# Altium PCB Choin1_0.PcbDoc (part 3 of 3)
Units mm, origin at the board's own origin, x right, y up, seen from the top; angles counter-clockwise.
Board outline 61 x 61 mm, 6 copper layers (Top Layer, MidLayer1, MidLayer 2, Mid-Layer 3, Mid-Layer 4, Bottom Layer), stack 1.533 mm thick; 195 components, 482 nets, 1610 pads, 432 vias.
Unrouted connection lines stored in the file: 170.
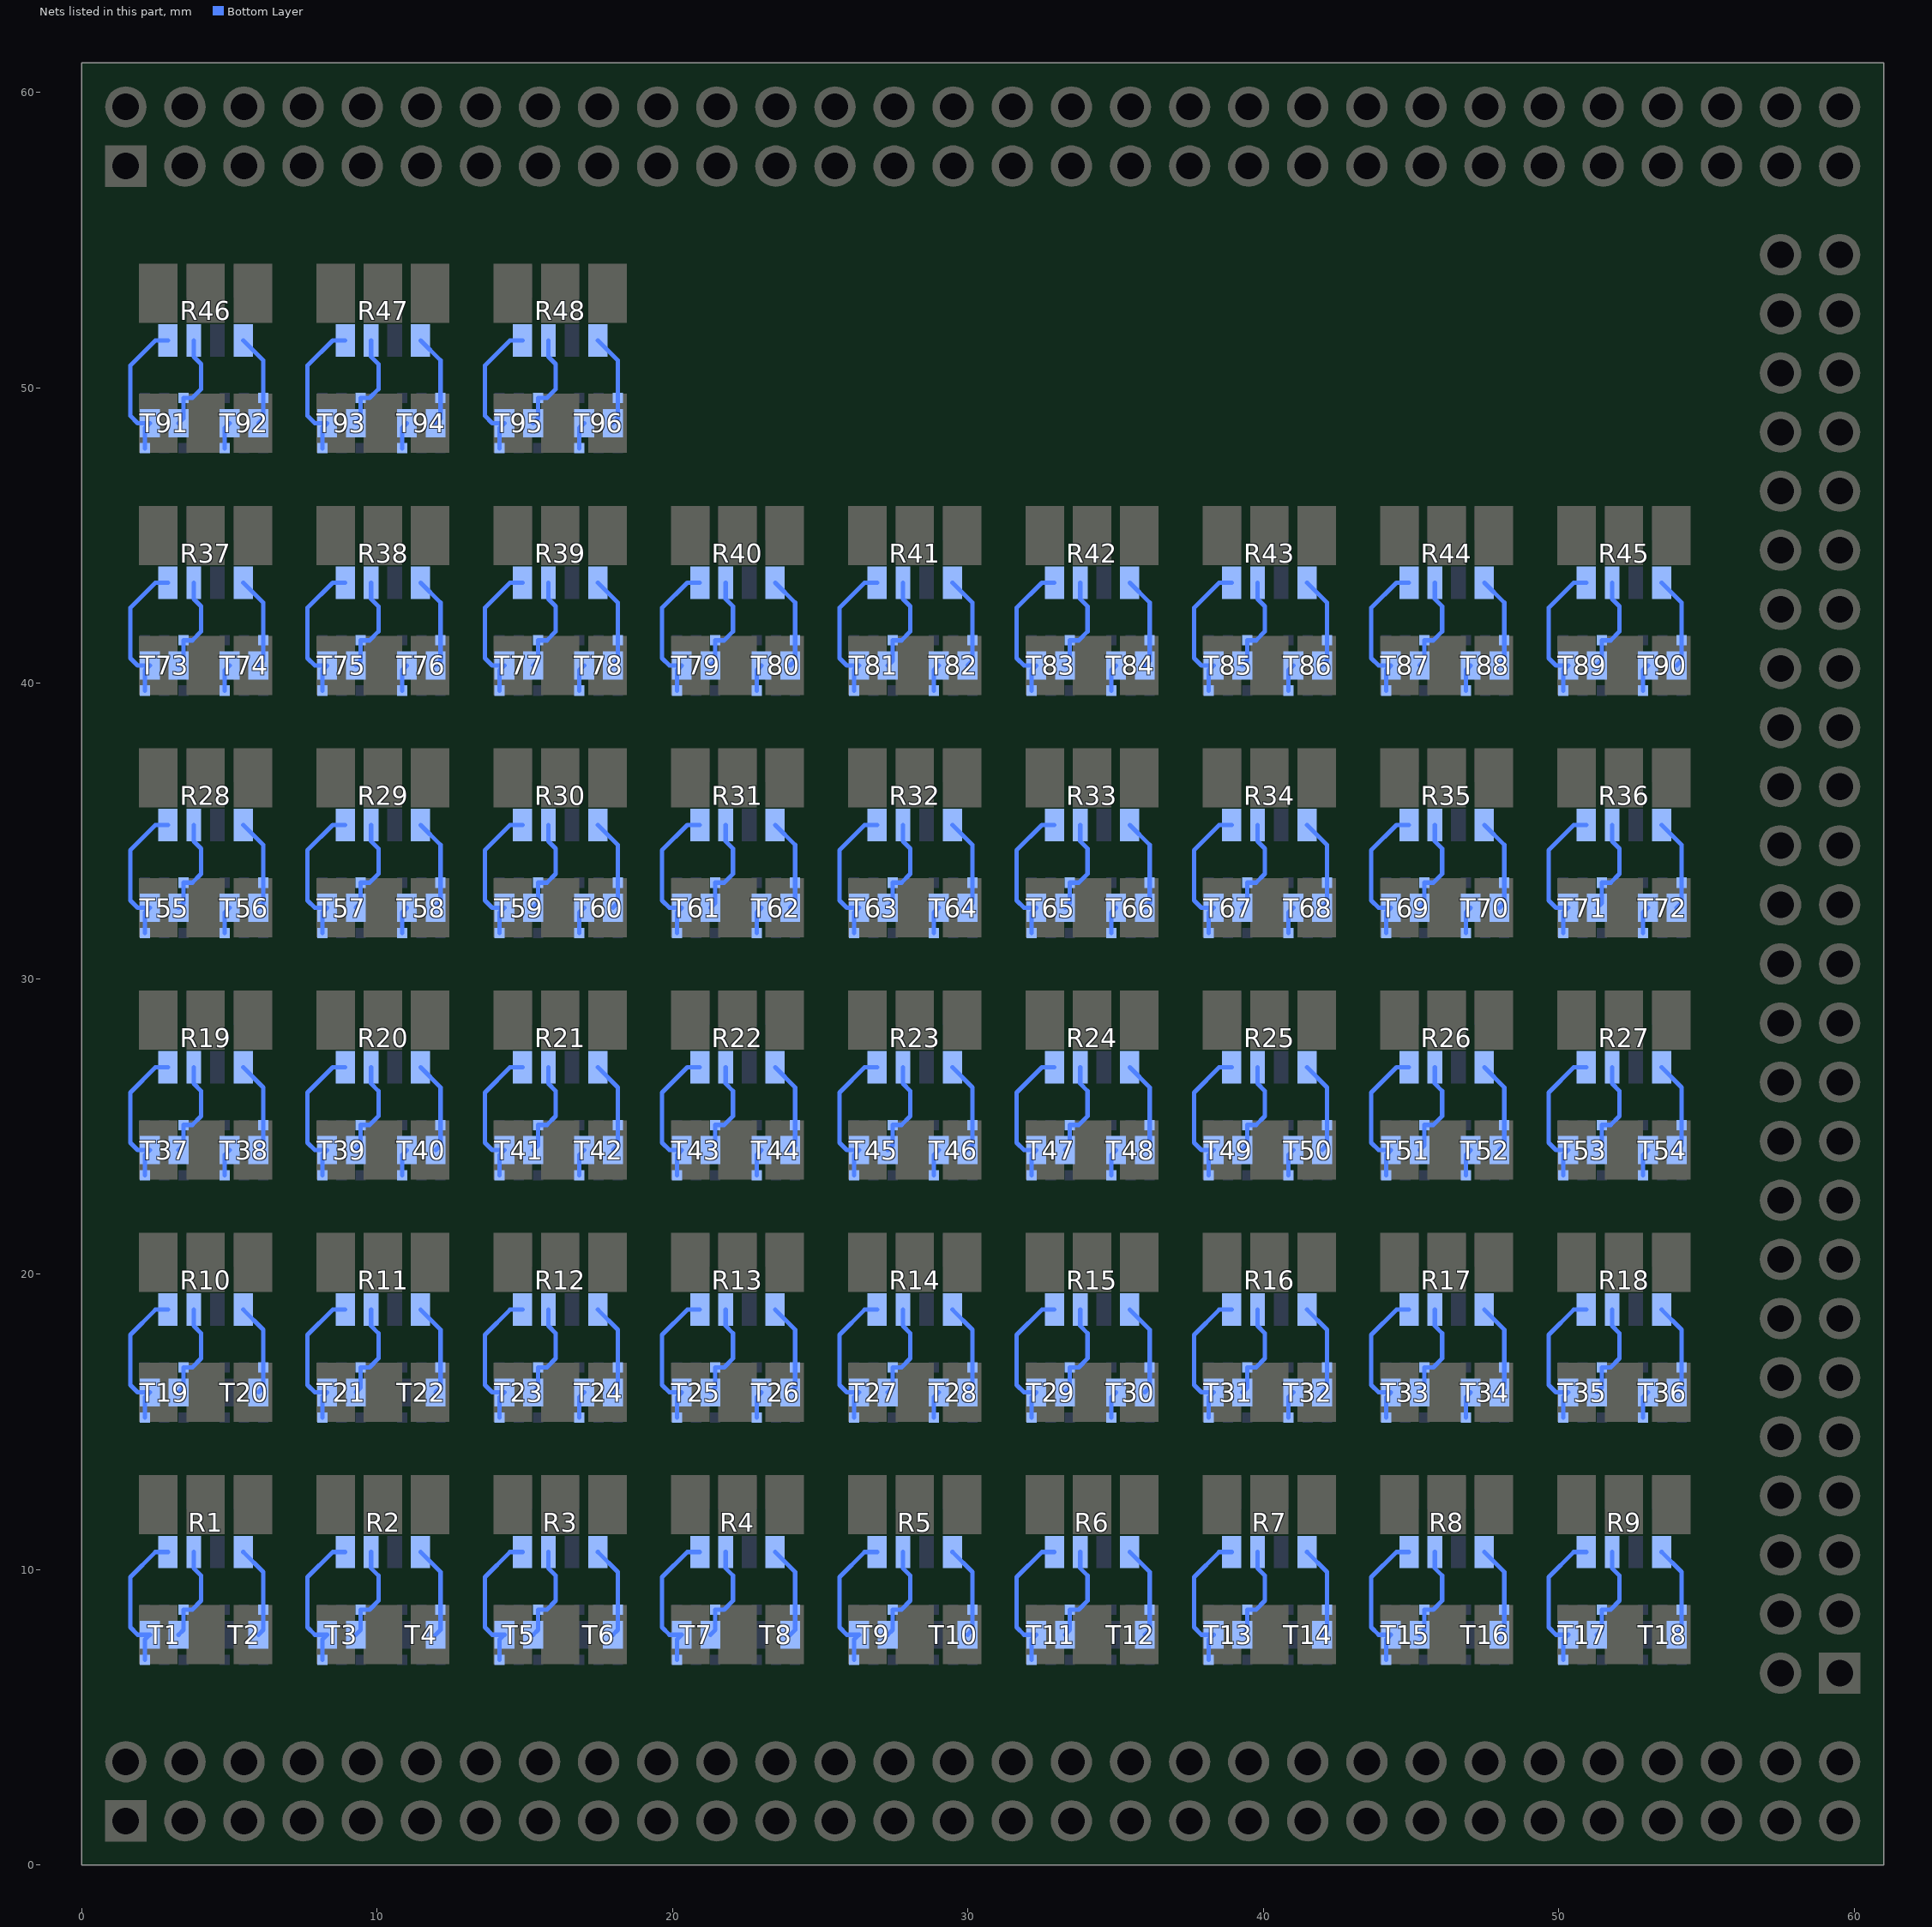
[diagram p3: the nets of this part, all layers, seen from the top]

## Via types
v1: diameter 0.8, hole 0.45, Top Layer to Bottom Layer, 432 vias

## Nets (pads, with @x,y where several pads share a name; then routed paths per layer and width w, separated by ;. In a path a pad name is that pad's centre, name@x,y a point inside that pad or via, vN(x,y) a via of type N, cw(c..) or ccw(c..) an arc to the next point about the centre after c; other vN are vias at no path point) (continued)
NetT24_3: T24.3 T24.8 | length 0.9
  Bottom Layer w0.15: T24.3@16.85,15.15 16.85,15.837 T24.8@17.013,16
NetT26_3: T26.3 T26.8 | length 0.9
  Bottom Layer w0.15: T26.3@22.85,15.15 22.85,15.837 T26.8@23.013,16
NetT28_3: T28.3 T28.8 | length 0.9
  Bottom Layer w0.15: T28.3@28.85,15.15 28.85,15.837 T28.8@29.012,16
NetT30_3: T30.3 T30.8 | length 0.9
  Bottom Layer w0.15: T30.3@34.85,15.15 34.85,15.837 T30.8@35.013,16
NetT32_3: T32.3 T32.8 | length 0.9
  Bottom Layer w0.15: T32.3@40.85,15.15 40.85,15.837 T32.8@41.013,16
NetT34_3: T34.3 T34.8 | length 0.9
  Bottom Layer w0.15: T34.3@46.85,15.15 46.85,15.837 T34.8@47.012,16
NetT36_3: T36.3 T36.8 | length 0.9
  Bottom Layer w0.15: T36.3@52.85,15.15 52.85,15.837 T36.8@53.013,16
NetT38_3: T38.3 T38.8 | length 0.9
  Bottom Layer w0.15: T38.3@4.85,23.35 4.85,24.037 T38.8@5.012,24.2
NetT40_3: T40.3 T40.8 | length 0.9
  Bottom Layer w0.15: T40.3@10.85,23.35 10.85,24.037 T40.8@11.013,24.2
NetT42_3: T42.3 T42.8 | length 0.9
  Bottom Layer w0.15: T42.3@16.85,23.35 16.85,24.037 T42.8@17.013,24.2
NetT44_3: T44.3 T44.8 | length 0.9
  Bottom Layer w0.15: T44.3@22.85,23.35 22.85,24.037 T44.8@23.013,24.2
NetT46_3: T46.3 T46.8 | length 0.9
  Bottom Layer w0.15: T46.3@28.85,23.35 28.85,24.037 T46.8@29.012,24.2
NetT48_3: T48.3 T48.8 | length 0.9
  Bottom Layer w0.15: T48.3@34.85,23.35 34.85,24.037 T48.8@35.013,24.2
NetT50_3: T50.3 T50.8 | length 0.9
  Bottom Layer w0.15: T50.3@40.85,23.35 40.85,24.037 T50.8@41.013,24.2
NetT52_3: T52.3 T52.8 | length 0.9
  Bottom Layer w0.15: T52.3@46.85,23.35 46.85,24.037 T52.8@47.012,24.2
NetT54_3: T54.3 T54.8 | length 0.9
  Bottom Layer w0.15: T54.3@52.85,23.35 52.85,24.037 T54.8@53.013,24.2
NetT56_3: T56.3 T56.8 | length 0.9
  Bottom Layer w0.15: T56.3@4.85,31.55 4.85,32.237 T56.8@5.012,32.4
NetT58_3: T58.3 T58.8 | length 0.9
  Bottom Layer w0.15: T58.3@10.85,31.55 10.85,32.237 T58.8@11.013,32.4
NetT60_3: T60.3 T60.8 | length 0.9
  Bottom Layer w0.15: T60.3@16.85,31.55 16.85,32.237 T60.8@17.013,32.4
NetT62_3: T62.3 T62.8 | length 0.9
  Bottom Layer w0.15: T62.3@22.85,31.55 22.85,32.237 T62.8@23.012,32.4
NetT64_3: T64.3 T64.8 | length 0.9
  Bottom Layer w0.15: T64.3@28.85,31.55 28.85,32.237 T64.8@29.012,32.4
NetT66_3: T66.3 T66.8 | length 0.9
  Bottom Layer w0.15: T66.3@34.85,31.55 34.85,32.237 T66.8@35.013,32.4
NetT68_3: T68.3 T68.8 | length 0.9
  Bottom Layer w0.15: T68.3@40.85,31.55 40.85,32.237 T68.8@41.013,32.4
NetT70_3: T70.3 T70.8 | length 0.9
  Bottom Layer w0.15: T70.3@46.85,31.55 46.85,32.237 T70.8@47.012,32.4
NetT72_3: T72.3 T72.8 | length 0.9
  Bottom Layer w0.15: T72.3@52.85,31.55 52.85,32.237 T72.8@53.013,32.4
NetT74_3: T74.3 T74.8 | length 0.9
  Bottom Layer w0.15: T74.3@4.85,39.75 4.85,40.437 T74.8@5.012,40.6
NetT76_3: T76.3 T76.8 | length 0.9
  Bottom Layer w0.15: T76.3@10.85,39.75 10.85,40.437 T76.8@11.013,40.6
NetT78_3: T78.3 T78.8 | length 0.9
  Bottom Layer w0.15: T78.3@16.85,39.75 16.85,40.437 T78.8@17.013,40.6
NetT80_3: T80.3 T80.8 | length 0.9
  Bottom Layer w0.15: T80.3@22.85,39.75 22.85,40.437 T80.8@23.013,40.6
NetT82_3: T82.3 T82.8 | length 0.9
  Bottom Layer w0.15: T82.3@28.85,39.75 28.85,40.437 T82.8@29.012,40.6
NetT84_3: T84.3 T84.8 | length 0.9
  Bottom Layer w0.15: T84.3@34.85,39.75 34.85,40.437 T84.8@35.013,40.6
NetT86_3: T86.3 T86.8 | length 0.9
  Bottom Layer w0.15: T86.3@40.85,39.75 40.85,40.437 T86.8@41.013,40.6
NetT88_3: T88.3 T88.8 | length 0.9
  Bottom Layer w0.15: T88.3@46.85,39.75 46.85,40.437 T88.8@47.012,40.6
NetT90_3: T90.3 T90.8 | length 0.9
  Bottom Layer w0.15: T90.3@52.85,39.75 52.85,40.437 T90.8@53.013,40.6
NetT92_3: T92.3 T92.8 | length 0.9
  Bottom Layer w0.15: T92.3@4.85,47.95 4.85,48.637 T92.8@5.012,48.8
NetT94_3: T94.3 T94.8 | length 0.9
  Bottom Layer w0.15: T94.3@10.85,47.95 10.85,48.637 T94.8@11.013,48.8
NetT96_3: T96.3 T96.8 | length 0.9
  Bottom Layer w0.15: T96.3@16.85,47.95 16.85,48.637 T96.8@17.013,48.8
RLEDB0: R1.4 T1.3 T1.8 | length 5
  Bottom Layer w0.15: T1.3@2.15,6.95 2.15,7.638 T1.8@2.312,7.8 1.9,7.8 1.65,8.05 1.65,9.75 2.5,10.6 R1.4@2.925,10.6
RLEDB1: R2.4 T3.3 T3.8 | length 5
  Bottom Layer w0.15: T3.3@8.15,6.95 8.15,7.637 T3.8@8.312,7.8 7.9,7.8 7.65,8.05 7.65,9.75 8.5,10.6 R2.4@8.925,10.6
RLEDB2: R3.4 T5.3 T5.8 | length 5
  Bottom Layer w0.15: T5.3@14.15,6.95 14.15,7.637 T5.8@14.312,7.8 13.9,7.8 13.65,8.05 13.65,9.75 14.5,10.6 R3.4@14.925,10.6
RLEDB3: R4.4 T7.3 T7.8 | length 5
  Bottom Layer w0.15: T7.3@20.15,6.95 20.15,7.637 T7.8@20.312,7.8 19.9,7.8 19.65,8.05 19.65,9.75 20.5,10.6 R4.4@20.925,10.6
RLEDB4: R5.4 T9.3 T9.8 | length 5
  Bottom Layer w0.15: T9.3@26.15,6.95 26.15,7.637 T9.8@26.312,7.8 25.9,7.8 25.65,8.05 25.65,9.75 26.5,10.6 R5.4@26.925,10.6
RLEDB5: R6.4 T11.3 T11.8 | length 5
  Bottom Layer w0.15: T11.3@32.15,6.95 32.15,7.637 T11.8@32.312,7.8 31.9,7.8 31.65,8.05 31.65,9.75 32.5,10.6 R6.4@32.925,10.6
RLEDB6: R7.4 T13.3 T13.8 | length 5
  Bottom Layer w0.15: T13.3@38.15,6.95 38.15,7.637 T13.8@38.312,7.8 37.9,7.8 37.65,8.05 37.65,9.75 38.5,10.6 R7.4@38.925,10.6
RLEDB7: R8.4 T15.3 T15.8 | length 5
  Bottom Layer w0.15: T15.3@44.15,6.95 44.15,7.637 T15.8@44.312,7.8 43.9,7.8 43.65,8.05 43.65,9.75 44.5,10.6 R8.4@44.925,10.6
RLEDB8: R9.4 T17.3 T17.8 | length 5
  Bottom Layer w0.15: T17.3@50.15,6.95 50.15,7.637 T17.8@50.312,7.8 49.9,7.8 49.65,8.05 49.65,9.75 50.5,10.6 R9.4@50.925,10.6
RLEDB9: R10.4 T19.3 T19.8 | length 5
  Bottom Layer w0.15: T19.3@2.15,15.15 2.15,15.837 T19.8@2.312,16 1.9,16 1.65,16.25 1.65,17.95 2.5,18.8 R10.4@2.925,18.8
RLEDB10: R11.4 T21.3 T21.8 | length 5
  Bottom Layer w0.15: T21.3@8.15,15.15 8.15,15.837 T21.8@8.313,16 7.9,16 7.65,16.25 7.65,17.95 8.5,18.8 R11.4@8.925,18.8
RLEDB11: R12.4 T23.3 T23.8 | length 5
  Bottom Layer w0.15: T23.3@14.15,15.15 14.15,15.837 T23.8@14.313,16 13.9,16 13.65,16.25 13.65,17.95 14.5,18.8 R12.4@14.925,18.8
RLEDB12: R13.4 T25.3 T25.8 | length 5
  Bottom Layer w0.15: T25.3@20.15,15.15 20.15,15.837 T25.8@20.312,16 19.9,16 19.65,16.25 19.65,17.95 20.5,18.8 R13.4@20.925,18.8
RLEDB13: R14.4 T27.3 T27.8 | length 5
  Bottom Layer w0.15: T27.3@26.15,15.15 26.15,15.837 T27.8@26.313,16 25.9,16 25.65,16.25 25.65,17.95 26.5,18.8 R14.4@26.925,18.8
RLEDB14: R15.4 T29.3 T29.8 | length 5
  Bottom Layer w0.15: T29.3@32.15,15.15 32.15,15.837 T29.8@32.313,16 31.9,16 31.65,16.25 31.65,17.95 32.5,18.8 R15.4@32.925,18.8
RLEDB15: R16.4 T31.3 T31.8 | length 5
  Bottom Layer w0.15: T31.3@38.15,15.15 38.15,15.837 T31.8@38.313,16 37.9,16 37.65,16.25 37.65,17.95 38.5,18.8 R16.4@38.925,18.8
RLEDB16: R17.4 T33.3 T33.8 | length 5
  Bottom Layer w0.15: T33.3@44.15,15.15 44.15,15.837 T33.8@44.312,16 43.9,16 43.65,16.25 43.65,17.95 44.5,18.8 R17.4@44.925,18.8
RLEDB17: R18.4 T35.3 T35.8 | length 5
  Bottom Layer w0.15: T35.3@50.15,15.15 50.15,15.837 T35.8@50.313,16 49.9,16 49.65,16.25 49.65,17.95 50.5,18.8 R18.4@50.925,18.8
RLEDB18: R19.4 T37.3 T37.8 | length 5
  Bottom Layer w0.15: T37.3@2.15,23.35 2.15,24.037 T37.8@2.312,24.2 1.9,24.2 1.65,24.45 1.65,26.15 2.5,27 R19.4@2.925,27
RLEDB19: R20.4 T39.3 T39.8 | length 5
  Bottom Layer w0.15: T39.3@8.15,23.35 8.15,24.037 T39.8@8.313,24.2 7.9,24.2 7.65,24.45 7.65,26.15 8.5,27 R20.4@8.925,27
RLEDB20: R21.4 T41.3 T41.8 | length 5
  Bottom Layer w0.15: T41.3@14.15,23.35 14.15,24.037 T41.8@14.313,24.2 13.9,24.2 13.65,24.45 13.65,26.15 14.5,27 R21.4@14.925,27
RLEDB21: R22.4 T43.3 T43.8 | length 5
  Bottom Layer w0.15: T43.3@20.15,23.35 20.15,24.037 T43.8@20.312,24.2 19.9,24.2 19.65,24.45 19.65,26.15 20.5,27 R22.4@20.925,27
RLEDB22: R23.4 T45.3 T45.8 | length 5
  Bottom Layer w0.15: T45.3@26.15,23.35 26.15,24.037 T45.8@26.313,24.2 25.9,24.2 25.65,24.45 25.65,26.15 26.5,27 R23.4@26.925,27
RLEDB23: R24.4 T47.3 T47.8 | length 5
  Bottom Layer w0.15: T47.3@32.15,23.35 32.15,24.037 T47.8@32.313,24.2 31.9,24.2 31.65,24.45 31.65,26.15 32.5,27 R24.4@32.925,27
RLEDB24: R25.4 T49.3 T49.8 | length 5
  Bottom Layer w0.15: T49.3@38.15,23.35 38.15,24.037 T49.8@38.313,24.2 37.9,24.2 37.65,24.45 37.65,26.15 38.5,27 R25.4@38.925,27
RLEDB25: R26.4 T51.3 T51.8 | length 5
  Bottom Layer w0.15: T51.3@44.15,23.35 44.15,24.037 T51.8@44.312,24.2 43.9,24.2 43.65,24.45 43.65,26.15 44.5,27 R26.4@44.925,27
RLEDB26: R27.4 T53.3 T53.8 | length 5
  Bottom Layer w0.15: T53.3@50.15,23.35 50.15,24.037 T53.8@50.313,24.2 49.9,24.2 49.65,24.45 49.65,26.15 50.5,27 R27.4@50.925,27
RLEDB27: R28.4 T55.3 T55.8 | length 5
  Bottom Layer w0.15: T55.3@2.15,31.55 2.15,32.237 T55.8@2.312,32.4 1.9,32.4 1.65,32.65 1.65,34.35 2.5,35.2 R28.4@2.925,35.2
RLEDB28: R29.4 T57.3 T57.8 | length 5
  Bottom Layer w0.15: T57.3@8.15,31.55 8.15,32.237 T57.8@8.313,32.4 7.9,32.4 7.65,32.65 7.65,34.35 8.5,35.2 R29.4@8.925,35.2
RLEDB29: R30.4 T59.3 T59.8 | length 5
  Bottom Layer w0.15: T59.3@14.15,31.55 14.15,32.237 T59.8@14.313,32.4 13.9,32.4 13.65,32.65 13.65,34.35 14.5,35.2 R30.4@14.925,35.2
RLEDB30: R31.4 T61.3 T61.8 | length 5
  Bottom Layer w0.15: T61.3@20.15,31.55 20.15,32.237 T61.8@20.312,32.4 19.9,32.4 19.65,32.65 19.65,34.35 20.5,35.2 R31.4@20.925,35.2
RLEDB31: R32.4 T63.3 T63.8 | length 5
  Bottom Layer w0.15: T63.3@26.15,31.55 26.15,32.237 T63.8@26.313,32.4 25.9,32.4 25.65,32.65 25.65,34.35 26.5,35.2 R32.4@26.925,35.2
RLEDB32: R33.4 T65.3 T65.8 | length 5
  Bottom Layer w0.15: T65.3@32.15,31.55 32.15,32.237 T65.8@32.313,32.4 31.9,32.4 31.65,32.65 31.65,34.35 32.5,35.2 R33.4@32.925,35.2
RLEDB33: R34.4 T67.3 T67.8 | length 5
  Bottom Layer w0.15: T67.3@38.15,31.55 38.15,32.237 T67.8@38.312,32.4 37.9,32.4 37.65,32.65 37.65,34.35 38.5,35.2 R34.4@38.925,35.2
RLEDB34: R35.4 T69.3 T69.8 | length 5
  Bottom Layer w0.15: T69.3@44.15,31.55 44.15,32.237 T69.8@44.312,32.4 43.9,32.4 43.65,32.65 43.65,34.35 44.5,35.2 R35.4@44.925,35.2
RLEDB35: R36.4 T71.3 T71.8 | length 5
  Bottom Layer w0.15: T71.3@50.15,31.55 50.15,32.237 T71.8@50.313,32.4 49.9,32.4 49.65,32.65 49.65,34.35 50.5,35.2 R36.4@50.925,35.2
RLEDB36: R37.4 T73.3 T73.8 | length 5
  Bottom Layer w0.15: T73.3@2.15,39.75 2.15,40.437 T73.8@2.312,40.6 1.9,40.6 1.65,40.85 1.65,42.55 2.5,43.4 R37.4@2.925,43.4
RLEDB37: R38.4 T75.3 T75.8 | length 5
  Bottom Layer w0.15: T75.3@8.15,39.75 8.15,40.437 T75.8@8.313,40.6 7.9,40.6 7.65,40.85 7.65,42.55 8.5,43.4 R38.4@8.925,43.4
RLEDB38: R39.4 T77.3 T77.8 | length 5
  Bottom Layer w0.15: T77.3@14.15,39.75 14.15,40.437 T77.8@14.313,40.6 13.9,40.6 13.65,40.85 13.65,42.55 14.5,43.4 R39.4@14.925,43.4
RLEDB39: R40.4 T79.3 T79.8 | length 5
  Bottom Layer w0.15: T79.3@20.15,39.75 20.15,40.437 T79.8@20.312,40.6 19.9,40.6 19.65,40.85 19.65,42.55 20.5,43.4 R40.4@20.925,43.4
RLEDB40: R41.4 T81.3 T81.8 | length 5
  Bottom Layer w0.15: T81.3@26.15,39.75 26.15,40.437 T81.8@26.313,40.6 25.9,40.6 25.65,40.85 25.65,42.55 26.5,43.4 R41.4@26.925,43.4
RLEDB41: R42.4 T83.3 T83.8 | length 5
  Bottom Layer w0.15: T83.3@32.15,39.75 32.15,40.437 T83.8@32.313,40.6 31.9,40.6 31.65,40.85 31.65,42.55 32.5,43.4 R42.4@32.925,43.4
RLEDB42: R43.4 T85.3 T85.8 | length 5
  Bottom Layer w0.15: T85.3@38.15,39.75 38.15,40.437 T85.8@38.313,40.6 37.9,40.6 37.65,40.85 37.65,42.55 38.5,43.4 R43.4@38.925,43.4
RLEDB43: R44.4 T87.3 T87.8 | length 5
  Bottom Layer w0.15: T87.3@44.15,39.75 44.15,40.437 T87.8@44.312,40.6 43.9,40.6 43.65,40.85 43.65,42.55 44.5,43.4 R44.4@44.925,43.4
RLEDB44: R45.4 T89.3 T89.8 | length 5
  Bottom Layer w0.15: T89.3@50.15,39.75 50.15,40.437 T89.8@50.313,40.6 49.9,40.6 49.65,40.85 49.65,42.55 50.5,43.4 R45.4@50.925,43.4
RLEDB45: R46.4 T91.3 T91.8 | length 5
  Bottom Layer w0.15: T91.3@2.15,47.95 2.15,48.637 T91.8@2.312,48.8 1.9,48.8 1.65,49.05 1.65,50.75 2.5,51.6 R46.4@2.925,51.6
RLEDB46: R47.4 T93.3 T93.8 | length 5
  Bottom Layer w0.15: T93.3@8.15,47.95 8.15,48.637 T93.8@8.313,48.8 7.9,48.8 7.65,49.05 7.65,50.75 8.5,51.6 R47.4@8.925,51.6
RLEDB47: R48.4 T95.3 T95.8 | length 5
  Bottom Layer w0.15: T95.3@14.15,47.95 14.15,48.637 T95.8@14.313,48.8 13.9,48.8 13.65,49.05 13.65,50.75 14.5,51.6 R48.4@14.925,51.6
RLEDG0: R1.1 T2.6 T2.7 | length 3.1
  Bottom Layer w0.15: R1.1@5.475,10.6 6.15,9.925 T2.6@6.15,8.65 6.15,7.963 T2.7@5.987,7.8
RLEDG1: R2.1 T4.6 T4.7 | length 3.1
  Bottom Layer w0.15: R2.1@11.475,10.6 12.15,9.925 T4.6@12.15,8.65 12.15,7.962 T4.7@11.987,7.8
RLEDG2: R3.1 T6.6 T6.7 | length 3.1
  Bottom Layer w0.15: R3.1@17.475,10.6 18.15,9.925 T6.6@18.15,8.65 18.15,7.962 T6.7@17.987,7.8
RLEDG3: R4.1 T8.6 T8.7 | length 3.1
  Bottom Layer w0.15: R4.1@23.475,10.6 24.15,9.925 T8.6@24.15,8.65 24.15,7.962 T8.7@23.987,7.8
RLEDG4: R5.1 T10.6 T10.7 | length 3.1
  Bottom Layer w0.15: R5.1@29.475,10.6 30.15,9.925 T10.6@30.15,8.65 30.15,7.962 T10.7@29.987,7.8
RLEDG5: R6.1 T12.6 T12.7 | length 3.1
  Bottom Layer w0.15: R6.1@35.475,10.6 36.15,9.925 T12.6@36.15,8.65 36.15,7.962 T12.7@35.987,7.8
RLEDG6: R7.1 T14.6 T14.7 | length 3.1
  Bottom Layer w0.15: R7.1@41.475,10.6 42.15,9.925 T14.6@42.15,8.65 42.15,7.962 T14.7@41.987,7.8
RLEDG7: R8.1 T16.6 T16.7 | length 3.1
  Bottom Layer w0.15: R8.1@47.475,10.6 48.15,9.925 T16.6@48.15,8.65 48.15,7.962 T16.7@47.987,7.8
RLEDG8: R9.1 T18.6 T18.7 | length 3.1
  Bottom Layer w0.15: R9.1@53.475,10.6 54.15,9.925 T18.6@54.15,8.65 54.15,7.962 T18.7@53.987,7.8
RLEDG9: R10.1 T20.6 T20.7 | length 3.1
  Bottom Layer w0.15: R10.1@5.475,18.8 6.15,18.125 T20.6@6.15,16.85 6.15,16.162 T20.7@5.987,16
RLEDG10: R11.1 T22.6 T22.7 | length 3.1
  Bottom Layer w0.15: R11.1@11.475,18.8 12.15,18.125 T22.6@12.15,16.85 12.15,16.162 T22.7@11.987,16
RLEDG11: R12.1 T24.6 T24.7 | length 3.1
  Bottom Layer w0.15: R12.1@17.475,18.8 18.15,18.125 T24.6@18.15,16.85 18.15,16.162 T24.7@17.988,16
RLEDG12: R13.1 T26.6 T26.7 | length 3.1
  Bottom Layer w0.15: R13.1@23.475,18.8 24.15,18.125 T26.6@24.15,16.85 24.15,16.162 T26.7@23.988,16
RLEDG13: R14.1 T28.6 T28.7 | length 3.1
  Bottom Layer w0.15: R14.1@29.475,18.8 30.15,18.125 T28.6@30.15,16.85 30.15,16.162 T28.7@29.987,16
RLEDG14: R15.1 T30.6 T30.7 | length 3.1
  Bottom Layer w0.15: R15.1@35.475,18.8 36.15,18.125 T30.6@36.15,16.85 36.15,16.162 T30.7@35.987,16
RLEDG15: R16.1 T32.6 T32.7 | length 3.1
  Bottom Layer w0.15: R16.1@41.475,18.8 42.15,18.125 T32.6@42.15,16.85 42.15,16.162 T32.7@41.988,16
RLEDG16: R17.1 T34.6 T34.7 | length 3.1
  Bottom Layer w0.15: R17.1@47.475,18.8 48.15,18.125 T34.6@48.15,16.85 48.15,16.162 T34.7@47.987,16
RLEDG17: R18.1 T36.6 T36.7 | length 3.1
  Bottom Layer w0.15: R18.1@53.475,18.8 54.15,18.125 T36.6@54.15,16.85 54.15,16.162 T36.7@53.987,16
RLEDG18: R19.1 T38.6 T38.7 | length 3.1
  Bottom Layer w0.15: R19.1@5.475,27 6.15,26.325 T38.6@6.15,25.05 6.15,24.362 T38.7@5.987,24.2
RLEDG19: R20.1 T40.6 T40.7 | length 3.1
  Bottom Layer w0.15: R20.1@11.475,27 12.15,26.325 T40.6@12.15,25.05 12.15,24.362 T40.7@11.987,24.2
RLEDG20: R21.1 T42.6 T42.7 | length 3.1
  Bottom Layer w0.15: R21.1@17.475,27 18.15,26.325 T42.6@18.15,25.05 18.15,24.362 T42.7@17.988,24.2
RLEDG21: R22.1 T44.6 T44.7 | length 3.1
  Bottom Layer w0.15: R22.1@23.475,27 24.15,26.325 T44.6@24.15,25.05 24.15,24.362 T44.7@23.988,24.2
RLEDG22: R23.1 T46.6 T46.7 | length 3.1
  Bottom Layer w0.15: R23.1@29.475,27 30.15,26.325 T46.6@30.15,25.05 30.15,24.362 T46.7@29.987,24.2
RLEDG23: R24.1 T48.6 T48.7 | length 3.1
  Bottom Layer w0.15: R24.1@35.475,27 36.15,26.325 T48.6@36.15,25.05 36.15,24.362 T48.7@35.987,24.2
RLEDG24: R25.1 T50.6 T50.7 | length 3.1
  Bottom Layer w0.15: R25.1@41.475,27 42.15,26.325 T50.6@42.15,25.05 42.15,24.362 T50.7@41.988,24.2
RLEDG25: R26.1 T52.6 T52.7 | length 3.1
  Bottom Layer w0.15: R26.1@47.475,27 48.15,26.325 T52.6@48.15,25.05 48.15,24.362 T52.7@47.987,24.2
RLEDG26: R27.1 T54.6 T54.7 | length 3.1
  Bottom Layer w0.15: R27.1@53.475,27 54.15,26.325 T54.6@54.15,25.05 54.15,24.362 T54.7@53.987,24.2
RLEDG27: R28.1 T56.6 T56.7 | length 3.1
  Bottom Layer w0.15: R28.1@5.475,35.2 6.15,34.525 T56.6@6.15,33.25 6.15,32.562 T56.7@5.987,32.4
RLEDG28: R29.1 T58.6 T58.7 | length 3.1
  Bottom Layer w0.15: R29.1@11.475,35.2 12.15,34.525 T58.6@12.15,33.25 12.15,32.562 T58.7@11.987,32.4
RLEDG29: R30.1 T60.6 T60.7 | length 3.1
  Bottom Layer w0.15: R30.1@17.475,35.2 18.15,34.525 T60.6@18.15,33.25 18.15,32.562 T60.7@17.988,32.4
RLEDG30: R31.1 T62.6 T62.7 | length 3.1
  Bottom Layer w0.15: R31.1@23.475,35.2 24.15,34.525 T62.6@24.15,33.25 24.15,32.562 T62.7@23.987,32.4
RLEDG31: R32.1 T64.6 T64.7 | length 3.1
  Bottom Layer w0.15: R32.1@29.475,35.2 30.15,34.525 T64.6@30.15,33.25 30.15,32.562 T64.7@29.987,32.4
RLEDG32: R33.1 T66.6 T66.7 | length 3.1
  Bottom Layer w0.15: R33.1@35.475,35.2 36.15,34.525 T66.6@36.15,33.25 36.15,32.562 T66.7@35.987,32.4
RLEDG33: R34.1 T68.6 T68.7 | length 3.1
  Bottom Layer w0.15: R34.1@41.475,35.2 42.15,34.525 T68.6@42.15,33.25 42.15,32.562 T68.7@41.988,32.4
RLEDG34: R35.1 T70.6 T70.7 | length 3.1
  Bottom Layer w0.15: R35.1@47.475,35.2 48.15,34.525 T70.6@48.15,33.25 48.15,32.562 T70.7@47.987,32.4
RLEDG35: R36.1 T72.6 T72.7 | length 3.1
  Bottom Layer w0.15: R36.1@53.475,35.2 54.15,34.525 T72.6@54.15,33.25 54.15,32.562 T72.7@53.987,32.4
RLEDG36: R37.1 T74.6 T74.7 | length 3.1
  Bottom Layer w0.15: R37.1@5.475,43.4 6.15,42.725 T74.6@6.15,41.45 6.15,40.762 T74.7@5.987,40.6
RLEDG37: R38.1 T76.6 T76.7 | length 3.1
  Bottom Layer w0.15: R38.1@11.475,43.4 12.15,42.725 T76.6@12.15,41.45 12.15,40.762 T76.7@11.987,40.6
RLEDG38: R39.1 T78.6 T78.7 | length 3.1
  Bottom Layer w0.15: R39.1@17.475,43.4 18.15,42.725 T78.6@18.15,41.45 18.15,40.762 T78.7@17.988,40.6
RLEDG39: R40.1 T80.6 T80.7 | length 3.1
  Bottom Layer w0.15: R40.1@23.475,43.4 24.15,42.725 T80.6@24.15,41.45 24.15,40.762 T80.7@23.988,40.6
RLEDG40: R41.1 T82.6 T82.7 | length 3.1
  Bottom Layer w0.15: R41.1@29.475,43.4 30.15,42.725 T82.6@30.15,41.45 30.15,40.762 T82.7@29.987,40.6
RLEDG41: R42.1 T84.6 T84.7 | length 3.1
  Bottom Layer w0.15: R42.1@35.475,43.4 36.15,42.725 T84.6@36.15,41.45 36.15,40.762 T84.7@35.987,40.6
RLEDG42: R43.1 T86.6 T86.7 | length 3.1
  Bottom Layer w0.15: R43.1@41.475,43.4 42.15,42.725 T86.6@42.15,41.45 42.15,40.762 T86.7@41.988,40.6
RLEDG43: R44.1 T88.6 T88.7 | length 3.1
  Bottom Layer w0.15: R44.1@47.475,43.4 48.15,42.725 T88.6@48.15,41.45 48.15,40.762 T88.7@47.987,40.6
RLEDG44: R45.1 T90.6 T90.7 | length 3.1
  Bottom Layer w0.15: R45.1@53.475,43.4 54.15,42.725 T90.6@54.15,41.45 54.15,40.762 T90.7@53.987,40.6
RLEDG45: R46.1 T92.6 T92.7 | length 3.1
  Bottom Layer w0.15: R46.1@5.475,51.6 6.15,50.925 T92.6@6.15,49.65 6.15,48.962 T92.7@5.987,48.8
RLEDG46: R47.1 T94.6 T94.7 | length 3.1
  Bottom Layer w0.15: R47.1@11.475,51.6 12.15,50.925 T94.6@12.15,49.65 12.15,48.962 T94.7@11.987,48.8
RLEDG47: R48.1 T96.6 T96.7 | length 3.1
  Bottom Layer w0.15: R48.1@17.475,51.6 18.15,50.925 T96.6@18.15,49.65 18.15,48.962 T96.7@17.988,48.8
RLEDR0: R1.3 T1.6 T1.7 | length 3.4
  Bottom Layer w0.15: T1.7@3.287,7.8 3.45,7.963 T1.6@3.45,8.65 3.75,8.65 4.05,8.95 4.05,9.8 3.8,10.05 R1.3@3.8,10.6
RLEDR1: R2.3 T3.6 T3.7 | length 3.4
  Bottom Layer w0.15: T3.7@9.287,7.8 9.45,7.962 T3.6@9.45,8.65 9.75,8.65 10.05,8.95 10.05,9.8 9.8,10.05 R2.3@9.8,10.6
RLEDR2: R3.3 T5.6 T5.7 | length 3.4
  Bottom Layer w0.15: T5.7@15.287,7.8 15.45,7.962 T5.6@15.45,8.65 15.75,8.65 16.05,8.95 16.05,9.8 15.8,10.05 R3.3@15.8,10.6
RLEDR3: R4.3 T7.6 T7.7 | length 3.4
  Bottom Layer w0.15: T7.7@21.287,7.8 21.45,7.962 T7.6@21.45,8.65 21.75,8.65 22.05,8.95 22.05,9.8 21.8,10.05 R4.3@21.8,10.6
RLEDR4: R5.3 T9.6 T9.7 | length 3.4
  Bottom Layer w0.15: T9.7@27.287,7.8 27.45,7.962 T9.6@27.45,8.65 27.75,8.65 28.05,8.95 28.05,9.8 27.8,10.05 R5.3@27.8,10.6
RLEDR5: R6.3 T11.6 T11.7 | length 3.4
  Bottom Layer w0.15: T11.7@33.287,7.8 33.45,7.962 T11.6@33.45,8.65 33.75,8.65 34.05,8.95 34.05,9.8 33.8,10.05 R6.3@33.8,10.6
RLEDR6: R7.3 T13.6 T13.7 | length 3.4
  Bottom Layer w0.15: T13.7@39.287,7.8 39.45,7.962 T13.6@39.45,8.65 39.75,8.65 40.05,8.95 40.05,9.8 39.8,10.05 R7.3@39.8,10.6
RLEDR7: R8.3 T15.6 T15.7 | length 3.4
  Bottom Layer w0.15: T15.7@45.287,7.8 45.45,7.962 T15.6@45.45,8.65 45.75,8.65 46.05,8.95 46.05,9.8 45.8,10.05 R8.3@45.8,10.6
RLEDR8: R9.3 T17.6 T17.7 | length 3.4
  Bottom Layer w0.15: T17.7@51.287,7.8 51.45,7.962 T17.6@51.45,8.65 51.75,8.65 52.05,8.95 52.05,9.8 51.8,10.05 R9.3@51.8,10.6
RLEDR9: R10.3 T19.6 T19.7 | length 3.4
  Bottom Layer w0.15: T19.7@3.287,16 3.45,16.162 T19.6@3.45,16.85 3.75,16.85 4.05,17.15 4.05,18 3.8,18.25 R10.3@3.8,18.8
RLEDR10: R11.3 T21.6 T21.7 | length 3.4
  Bottom Layer w0.15: T21.7@9.287,16 9.45,16.162 T21.6@9.45,16.85 9.75,16.85 10.05,17.15 10.05,18 9.8,18.25 R11.3@9.8,18.8
RLEDR11: R12.3 T23.6 T23.7 | length 3.4
  Bottom Layer w0.15: T23.7@15.288,16 15.45,16.162 T23.6@15.45,16.85 15.75,16.85 16.05,17.15 16.05,18 15.8,18.25 R12.3@15.8,18.8
RLEDR12: R13.3 T25.6 T25.7 | length 3.4
  Bottom Layer w0.15: T25.7@21.287,16 21.45,16.162 T25.6@21.45,16.85 21.75,16.85 22.05,17.15 22.05,18 21.8,18.25 R13.3@21.8,18.8
RLEDR13: R14.3 T27.6 T27.7 | length 3.4
  Bottom Layer w0.15: T27.7@27.287,16 27.45,16.162 T27.6@27.45,16.85 27.75,16.85 28.05,17.15 28.05,18 27.8,18.25 R14.3@27.8,18.8
RLEDR14: R15.3 T29.6 T29.7 | length 3.4
  Bottom Layer w0.15: T29.7@33.288,16 33.45,16.162 T29.6@33.45,16.85 33.75,16.85 34.05,17.15 34.05,18 33.8,18.25 R15.3@33.8,18.8
RLEDR15: R16.3 T31.6 T31.7 | length 3.4
  Bottom Layer w0.15: T31.7@39.288,16 39.45,16.162 T31.6@39.45,16.85 39.75,16.85 40.05,17.15 40.05,18 39.8,18.25 R16.3@39.8,18.8
RLEDR16: R17.3 T33.6 T33.7 | length 3.4
  Bottom Layer w0.15: T33.7@45.287,16 45.45,16.162 T33.6@45.45,16.85 45.75,16.85 46.05,17.15 46.05,18 45.8,18.25 R17.3@45.8,18.8
RLEDR17: R18.3 T35.6 T35.7 | length 3.4
  Bottom Layer w0.15: T35.7@51.287,16 51.45,16.162 T35.6@51.45,16.85 51.75,16.85 52.05,17.15 52.05,18 51.8,18.25 R18.3@51.8,18.8
RLEDR18: R19.3 T37.6 T37.7 | length 3.4
  Bottom Layer w0.15: T37.7@3.287,24.2 3.45,24.362 T37.6@3.45,25.05 3.75,25.05 4.05,25.35 4.05,26.2 3.8,26.45 R19.3@3.8,27
RLEDR19: R20.3 T39.6 T39.7 | length 3.4
  Bottom Layer w0.15: T39.7@9.287,24.2 9.45,24.362 T39.6@9.45,25.05 9.75,25.05 10.05,25.35 10.05,26.2 9.8,26.45 R20.3@9.8,27
RLEDR20: R21.3 T41.6 T41.7 | length 3.4
  Bottom Layer w0.15: T41.7@15.288,24.2 15.45,24.362 T41.6@15.45,25.05 15.75,25.05 16.05,25.35 16.05,26.2 15.8,26.45 R21.3@15.8,27
RLEDR21: R22.3 T43.6 T43.7 | length 3.4
  Bottom Layer w0.15: T43.7@21.287,24.2 21.45,24.362 T43.6@21.45,25.05 21.75,25.05 22.05,25.35 22.05,26.2 21.8,26.45 R22.3@21.8,27
RLEDR22: R23.3 T45.6 T45.7 | length 3.4
  Bottom Layer w0.15: T45.7@27.287,24.2 27.45,24.362 T45.6@27.45,25.05 27.75,25.05 28.05,25.35 28.05,26.2 27.8,26.45 R23.3@27.8,27
RLEDR23: R24.3 T47.6 T47.7 | length 3.4
  Bottom Layer w0.15: T47.7@33.288,24.2 33.45,24.362 T47.6@33.45,25.05 33.75,25.05 34.05,25.35 34.05,26.2 33.8,26.45 R24.3@33.8,27
RLEDR24: R25.3 T49.6 T49.7 | length 3.4
  Bottom Layer w0.15: T49.7@39.288,24.2 39.45,24.362 T49.6@39.45,25.05 39.75,25.05 40.05,25.35 40.05,26.2 39.8,26.45 R25.3@39.8,27
RLEDR25: R26.3 T51.6 T51.7 | length 3.4
  Bottom Layer w0.15: T51.7@45.287,24.2 45.45,24.362 T51.6@45.45,25.05 45.75,25.05 46.05,25.35 46.05,26.2 45.8,26.45 R26.3@45.8,27
RLEDR26: R27.3 T53.6 T53.7 | length 3.4
  Bottom Layer w0.15: T53.7@51.287,24.2 51.45,24.362 T53.6@51.45,25.05 51.75,25.05 52.05,25.35 52.05,26.2 51.8,26.45 R27.3@51.8,27
RLEDR27: R28.3 T55.6 T55.7 | length 3.4
  Bottom Layer w0.15: T55.7@3.287,32.4 3.45,32.562 T55.6@3.45,33.25 3.75,33.25 4.05,33.55 4.05,34.4 3.8,34.65 R28.3@3.8,35.2
RLEDR28: R29.3 T57.6 T57.7 | length 3.4
  Bottom Layer w0.15: T57.7@9.287,32.4 9.45,32.562 T57.6@9.45,33.25 9.75,33.25 10.05,33.55 10.05,34.4 9.8,34.65 R29.3@9.8,35.2
RLEDR29: R30.3 T59.6 T59.7 | length 3.4
  Bottom Layer w0.15: T59.7@15.288,32.4 15.45,32.562 T59.6@15.45,33.25 15.75,33.25 16.05,33.55 16.05,34.4 15.8,34.65 R30.3@15.8,35.2
RLEDR30: R31.3 T61.6 T61.7 | length 3.4
  Bottom Layer w0.15: T61.7@21.287,32.4 21.45,32.562 T61.6@21.45,33.25 21.75,33.25 22.05,33.55 22.05,34.4 21.8,34.65 R31.3@21.8,35.2
RLEDR31: R32.3 T63.6 T63.7 | length 3.4
  Bottom Layer w0.15: T63.7@27.287,32.4 27.45,32.562 T63.6@27.45,33.25 27.75,33.25 28.05,33.55 28.05,34.4 27.8,34.65 R32.3@27.8,35.2
RLEDR32: R33.3 T65.6 T65.7 | length 3.4
  Bottom Layer w0.15: T65.7@33.288,32.4 33.45,32.562 T65.6@33.45,33.25 33.75,33.25 34.05,33.55 34.05,34.4 33.8,34.65 R33.3@33.8,35.2
RLEDR33: R34.3 T67.6 T67.7 | length 3.4
  Bottom Layer w0.15: T67.7@39.287,32.4 39.45,32.562 T67.6@39.45,33.25 39.75,33.25 40.05,33.55 40.05,34.4 39.8,34.65 R34.3@39.8,35.2
RLEDR34: R35.3 T69.6 T69.7 | length 3.4
  Bottom Layer w0.15: T69.7@45.287,32.4 45.45,32.562 T69.6@45.45,33.25 45.75,33.25 46.05,33.55 46.05,34.4 45.8,34.65 R35.3@45.8,35.2
RLEDR35: R36.3 T71.6 T71.7 | length 3.4
  Bottom Layer w0.15: T71.7@51.287,32.4 51.45,32.562 T71.6@51.45,33.25 51.75,33.25 52.05,33.55 52.05,34.4 51.8,34.65 R36.3@51.8,35.2
RLEDR36: R37.3 T73.6 T73.7 | length 3.4
  Bottom Layer w0.15: T73.7@3.287,40.6 3.45,40.762 T73.6@3.45,41.45 3.75,41.45 4.05,41.75 4.05,42.6 3.8,42.85 R37.3@3.8,43.4
RLEDR37: R38.3 T75.6 T75.7 | length 3.4
  Bottom Layer w0.15: T75.7@9.287,40.6 9.45,40.762 T75.6@9.45,41.45 9.75,41.45 10.05,41.75 10.05,42.6 9.8,42.85 R38.3@9.8,43.4
RLEDR38: R39.3 T77.6 T77.7 | length 3.4
  Bottom Layer w0.15: T77.7@15.288,40.6 15.45,40.762 T77.6@15.45,41.45 15.75,41.45 16.05,41.75 16.05,42.6 15.8,42.85 R39.3@15.8,43.4
RLEDR39: R40.3 T79.6 T79.7 | length 3.4
  Bottom Layer w0.15: T79.7@21.287,40.6 21.45,40.762 T79.6@21.45,41.45 21.75,41.45 22.05,41.75 22.05,42.6 21.8,42.85 R40.3@21.8,43.4
RLEDR40: R41.3 T81.6 T81.7 | length 3.4
  Bottom Layer w0.15: T81.7@27.287,40.6 27.45,40.762 T81.6@27.45,41.45 27.75,41.45 28.05,41.75 28.05,42.6 27.8,42.85 R41.3@27.8,43.4
RLEDR41: R42.3 T83.6 T83.7 | length 3.4
  Bottom Layer w0.15: T83.7@33.288,40.6 33.45,40.762 T83.6@33.45,41.45 33.75,41.45 34.05,41.75 34.05,42.6 33.8,42.85 R42.3@33.8,43.4
RLEDR42: R43.3 T85.6 T85.7 | length 3.4
  Bottom Layer w0.15: T85.7@39.288,40.6 39.45,40.762 T85.6@39.45,41.45 39.75,41.45 40.05,41.75 40.05,42.6 39.8,42.85 R43.3@39.8,43.4
RLEDR43: R44.3 T87.6 T87.7 | length 3.4
  Bottom Layer w0.15: T87.7@45.287,40.6 45.45,40.762 T87.6@45.45,41.45 45.75,41.45 46.05,41.75 46.05,42.6 45.8,42.85 R44.3@45.8,43.4
RLEDR44: R45.3 T89.6 T89.7 | length 3.4
  Bottom Layer w0.15: T89.7@51.287,40.6 51.45,40.762 T89.6@51.45,41.45 51.75,41.45 52.05,41.75 52.05,42.6 51.8,42.85 R45.3@51.8,43.4
RLEDR45: R46.3 T91.6 T91.7 | length 3.4
  Bottom Layer w0.15: T91.7@3.287,48.8 3.45,48.962 T91.6@3.45,49.65 3.75,49.65 4.05,49.95 4.05,50.8 3.8,51.05 R46.3@3.8,51.6
RLEDR46: R47.3 T93.6 T93.7 | length 3.4
  Bottom Layer w0.15: T93.7@9.287,48.8 9.45,48.962 T93.6@9.45,49.65 9.75,49.65 10.05,49.95 10.05,50.8 9.8,51.05 R47.3@9.8,51.6
RLEDR47: R48.3 T95.6 T95.7 | length 3.4
  Bottom Layer w0.15: T95.7@15.288,48.8 15.45,48.962 T95.6@15.45,49.65 15.75,49.65 16.05,49.95 16.05,50.8 15.8,51.05 R48.3@15.8,51.6
pads on no net: D28.1 D28.2 D28.3 D29.1 D29.2 D29.3 D37.1 D37.2 D37.3 J1.33 J1.34 J1.35 J1.36 J1.37 J1.38 J1.39 J1.40 J1.41 J1.42 J1.43 J1.44 J1.45 J1.46 J1.47 J1.48 J1.49 J1.50 J1.51 J1.52 J1.53 J1.54 J1.55 J1.56 J1.57 J1.58 J1.59 J1.60 J2.1 J2.2 J2.3 J2.4 J2.5 J2.6 J2.7 J2.8 J2.9 J2.10 J2.11 J2.12 J2.13 J2.14 J2.15 J2.16 J2.17 J2.18 J2.19 J2.20 J2.21 J2.22 J2.23 J2.24 J2.25 J2.26 J2.27 J2.28 J2.29 J2.30 J2.31 J2.32 J2.33 J2.34 J2.35 J2.36 J2.37 J2.38 J2.39 J2.40 J2.41 J2.42 J2.43 J2.44 J2.45 J2.46 J2.47 J2.48 J2.49 J2.50 J2.51 J2.52 J2.53 J2.54 J2.55 J2.56 J2.57 J2.58 J2.59 J2.60 J3.1 J3.2 J3.3 J3.4 J3.5 J3.6 J3.7 J3.8 J3.9 J3.10 J3.11 J3.12 J3.13 J3.14 J3.15 J3.16 J3.17 J3.18 J3.19 J3.20 J3.21 J3.22 J3.23 J3.24 J3.25 J3.26 J3.27 J3.28 J3.29 J3.30 J3.31 J3.32 J3.33 J3.34 J3.35 J3.36 J3.37 J3.38 J3.39 J3.40 J3.41 J3.42 R1.2 R1.7 R2.2 R2.7 R3.2 R3.7 R4.2 R4.7 R5.2 R5.7 R6.2 R6.7 R7.2 R7.7 R8.2 R8.7 R9.2 R9.7 R10.2 R10.7 R11.2 R11.7 R12.2 R12.7 R13.2 R13.7 R14.2 R14.7 R15.2 R15.7 R16.2 R16.7 R17.2 R17.7 R18.2 R18.7 R19.2 R19.7 R20.2 R20.7 R21.2 R21.7 R22.2 R22.7 R23.2 R23.7 R24.2 R24.7 R25.2 R25.7 R26.2 R26.7 R27.2 R27.7 R28.2 R28.7 R29.2 R29.7 R30.2 R30.7 R31.2 R31.7 R32.2 R32.7 R33.2 R33.7 R34.2 R34.7 R35.2 R35.7 R36.2 R36.7 R37.2 R37.7 R38.2 R38.7 R39.2 R39.7 R40.2 R40.7 R41.2 R41.7 R42.2 R42.7 R43.2 R43.7 R44.2 R44.7 R45.2 R45.7 R46.2 R46.7 R47.2 R47.7 R48.2 R48.7 T2.5 T4.5 T6.5 T8.5 T10.5 T12.5 T14.5 T16.5 T18.5 T20.5 T22.5 T24.5 T26.5 T28.5 T30.5 T32.5 T34.5 T36.5 T38.5 T40.5 T42.5 T44.5 T46.5 T48.5 T50.5 T52.5 T54.5 T56.5 T58.5 T60.5 T62.5 T64.5 T66.5 T68.5 T70.5 T72.5 T74.5 T76.5 T78.5 T80.5 T82.5 T84.5 T86.5 T88.5 T90.5 T92.5 T94.5 T96.5
copper on no net: | length 228.9
  Top Layer w0.15: v1(19.4,53.85) 20.05,53.2 20.6,53.2 ; v1(19.45,51.6) 21.85,51.6 22.2,51.95 22.2,53.2 ; 23.8,53.2 24.5,53.2 v1(25,52.7) ; v1(25.4,53.85) 26.05,53.2 26.6,53.2 ; v1(25.45,51.6) 27.85,51.6 28.2,51.95 28.2,53.2 ; 29.8,53.2 30.5,53.2 v1(31,52.7) ; v1(31.4,53.85) 32.05,53.2 32.6,53.2 ; v1(31.45,51.6) 33.85,51.6 34.2,51.95 34.2,53.2 ; 35.8,53.2 36.5,53.2 v1(37,52.7) ; v1(37.4,53.85) 38.05,53.2 38.6,53.2 ; v1(37.45,51.6) 39.85,51.6 40.2,51.95 40.2,53.2 ; 41.8,53.2 42.5,53.2 v1(43,52.7) ; v1(43.4,53.85) 44.05,53.2 44.6,53.2 ; v1(43.45,51.6) 45.85,51.6 46.2,51.95 46.2,53.2 ; 47.8,53.2 48.5,53.2 v1(49,52.7) ; v1(49.4,53.85) 50.05,53.2 50.6,53.2 ; v1(49.45,51.6) 51.85,51.6 52.2,51.95 52.2,53.2 ; 53.8,53.2 54.5,53.2 v1(55,52.7)
  Bottom Layer w0.15: v1(19.4,53.85) 19.65,53.6 20.925,53.6 ; v1(19.45,51.6) 19.45,52 20.05,52.6 21.65,52.6 21.8,52.75 21.8,53.6 ; 20.15,47.95 20.15,48.637 20.312,48.8 19.9,48.8 19.65,49.05 19.65,50.75 20.5,51.6 20.925,51.6 ; 20.15,49.65 20.15,50.25 v1(20.3,50.4) ; v1(20.3,47.15) 20.8,47.65 20.8,47.95 ; 20.8,49.65 20.8,49.9 v1(21.3,50.4) ; 21.287,48.8 21.45,48.962 21.45,49.65 21.75,49.65 22.05,49.95 22.05,50.8 21.8,51.05 21.8,51.6 ; 21.45,47.95 22.2,47.95 ; 22.85,47.95 22.85,48.637 23.012,48.8 ; 22.85,49.65 22.4,49.65 22.2,49.45 22.2,47.95 ; v1@23,47.2 23.5,47.7 23.5,47.95 ; 23.475,51.6 24.15,50.925 24.15,49.65 24.15,48.962 23.987,48.8 ; 23.475,53.6 24.375,52.7 v1(25,52.7) ; 24.15,47.95 24.15,46.9 23.75,46.5 22.4,46.5 22.2,46.7 22.2,47.95 ; v1(25.4,53.85) 25.65,53.6 26.925,53.6 ; v1(25.45,51.6) 25.45,52 26.05,52.6 27.65,52.6 27.8,52.75 27.8,53.6 ; 26.15,47.95 26.15,48.637 26.313,48.8 25.9,48.8 25.65,49.05 25.65,50.75 26.5,51.6 26.925,51.6 ; 26.15,49.65 26.15,50.25 v1(26.3,50.4) ; v1(26.3,47.15) 26.8,47.65 26.8,47.95 ; 26.8,49.65 26.8,49.9 v1(27.3,50.4) ; 27.287,48.8 27.45,48.962 27.45,49.65 27.75,49.65 28.05,49.95 28.05,50.8 27.8,51.05 27.8,51.6 ; 27.45,47.95 28.2,47.95 ; 28.85,47.95 28.85,48.637 29.012,48.8 ; 28.85,49.65 28.4,49.65 28.2,49.45 28.2,47.95 ; v1@29,47.2 29.5,47.7 29.5,47.95 ; 29.475,51.6 30.15,50.925 30.15,49.65 30.15,48.962 29.987,48.8 ; 29.475,53.6 30.375,52.7 v1(31,52.7) ; 30.15,47.95 30.15,46.9 29.75,46.5 28.4,46.5 28.2,46.7 28.2,47.95 ; v1(31.4,53.85) 31.65,53.6 32.925,53.6 ; v1(31.45,51.6) 31.45,52 32.05,52.6 33.65,52.6 33.8,52.75 33.8,53.6 ; 32.15,47.95 32.15,48.637 32.313,48.8 31.9,48.8 31.65,49.05 31.65,50.75 32.5,51.6 32.925,51.6 ; 32.15,49.65 32.15,50.25 v1(32.3,50.4) ; v1(32.3,47.15) 32.8,47.65 32.8,47.95 ; 32.8,49.65 32.8,49.9 v1(33.3,50.4) ; 33.288,48.8 33.45,48.962 33.45,49.65 33.75,49.65 34.05,49.95 34.05,50.8 33.8,51.05 33.8,51.6 ; 33.45,47.95 34.2,47.95 ; 34.85,47.95 34.85,48.637 35.013,48.8 ; 34.85,49.65 34.4,49.65 34.2,49.45 34.2,47.95 ; v1@35,47.2 35.5,47.7 35.5,47.95 ; 35.475,51.6 36.15,50.925 36.15,49.65 36.15,48.962 35.987,48.8 ; 35.475,53.6 36.375,52.7 v1(37,52.7) ; 36.15,47.95 36.15,46.9 35.75,46.5 34.4,46.5 34.2,46.7 34.2,47.95 ; v1(37.4,53.85) 37.65,53.6 38.925,53.6 ; v1(37.45,51.6) 37.45,52 38.05,52.6 39.65,52.6 39.8,52.75 39.8,53.6 ; 38.15,47.95 38.15,48.637 38.313,48.8 37.9,48.8 37.65,49.05 37.65,50.75 38.5,51.6 38.925,51.6 ; 38.15,49.65 38.15,50.25 v1(38.3,50.4) ; v1(38.3,47.15) 38.8,47.65 38.8,47.95 ; 38.8,49.65 38.8,49.9 v1(39.3,50.4) ; 39.288,48.8 39.45,48.962 39.45,49.65 39.75,49.65 40.05,49.95 40.05,50.8 39.8,51.05 39.8,51.6 ; 39.45,47.95 40.2,47.95 ; 40.85,47.95 40.85,48.637 41.013,48.8 ; 40.85,49.65 40.4,49.65 40.2,49.45 40.2,47.95 ; v1@41,47.2 41.5,47.7 41.5,47.95 ; 41.475,51.6 42.15,50.925 42.15,49.65 42.15,48.962 41.988,48.8 ; 41.475,53.6 42.375,52.7 v1(43,52.7) ; 42.15,47.95 42.15,46.9 41.75,46.5 40.4,46.5 40.2,46.7 40.2,47.95 ; v1(43.4,53.85) 43.65,53.6 44.925,53.6 ; v1(43.45,51.6) 43.45,52 44.05,52.6 45.65,52.6 45.8,52.75 45.8,53.6 ; 44.15,47.95 44.15,48.637 44.312,48.8 43.9,48.8 43.65,49.05 43.65,50.75 44.5,51.6 44.925,51.6 ; 44.15,49.65 44.15,50.25 v1(44.3,50.4) ; v1(44.3,47.15) 44.8,47.65 44.8,47.95 ; 44.8,49.65 44.8,49.9 v1(45.3,50.4) ; 45.287,48.8 45.45,48.962 45.45,49.65 45.75,49.65 46.05,49.95 46.05,50.8 45.8,51.05 45.8,51.6 ; 45.45,47.95 46.2,47.95 ; 46.85,47.95 46.85,48.637 47.012,48.8 ; 46.85,49.65 46.4,49.65 46.2,49.45 46.2,47.95 ; v1@47,47.2 47.5,47.7 47.5,47.95 ; 47.475,51.6 48.15,50.925 48.15,49.65 48.15,48.962 47.987,48.8 ; 47.475,53.6 48.375,52.7 v1(49,52.7) ; 48.15,47.95 48.15,46.9 47.75,46.5 46.4,46.5 46.2,46.7 46.2,47.95 ; v1(49.4,53.85) 49.65,53.6 50.925,53.6 ; v1(49.45,51.6) 49.45,52 50.05,52.6 51.65,52.6 51.8,52.75 51.8,53.6 ; 50.15,47.95 50.15,48.637 50.313,48.8 49.9,48.8 49.65,49.05 49.65,50.75 50.5,51.6 50.925,51.6 ; 50.15,49.65 50.15,50.25 v1(50.3,50.4) ; v1(50.3,47.15) 50.8,47.65 50.8,47.95 ; 50.8,49.65 50.8,49.9 v1(51.3,50.4) ; 51.287,48.8 51.45,48.962 51.45,49.65 51.75,49.65 52.05,49.95 52.05,50.8 51.8,51.05 51.8,51.6 ; 51.45,47.95 52.2,47.95 ; 52.85,47.95 52.85,48.637 53.013,48.8 ; 52.85,49.65 52.4,49.65 52.2,49.45 52.2,47.95 ; v1@53,47.2 53.5,47.7 53.5,47.95 ; 53.475,51.6 54.15,50.925 54.15,49.65 54.15,48.962 53.987,48.8 ; 53.475,53.6 54.375,52.7 v1(55,52.7) ; 54.15,47.95 54.15,46.9 53.75,46.5 52.4,46.5 52.2,46.7 52.2,47.95
  other v1: 23.15,47.15 24.15,47.15 29.15,47.15 30.15,47.15 35.15,47.15 36.15,47.15 41.15,47.15 42.15,47.15 47.15,47.15 48.15,47.15 53.15,47.15 54.15,47.15

## Silkscreen, mask and mechanical layers (free items; w line width, h text height)
Obrys:
  the board outline again, w0.2

## Dimensions
0,61 to 61,0 on Dims
61,0 to 61,61 on Dims
0,0 to 1.7,7.5 on Dims
2.6,7.8 to 0.5,4.5 on Dims
2.6,7.8 to 2.6,16 on Dims
2.6,16 to 2.6,24.2 on Dims
2.6,24.2 to 2.6,32.4 on Dims
2.6,32.4 to 2.6,40.6 on Dims
2.6,40.6 to 2.6,48.8 on Dims
0.5,56.5 to 2.6,48.8 on Dims
0.5,56.5 to 2.6,53.2 on Dims